# EAGLE board dosimeter (EAGLE 6.1)
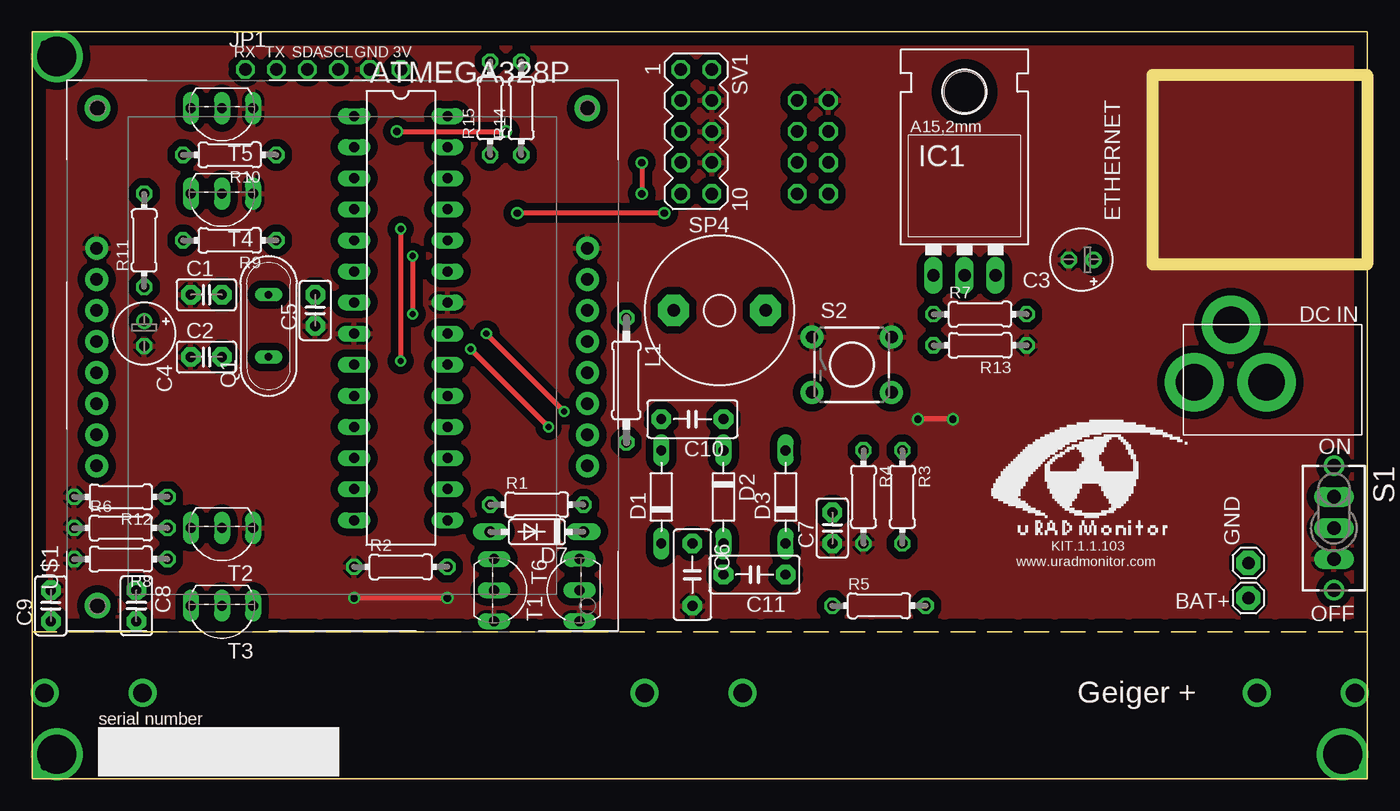
[diagram p0: board, top side]
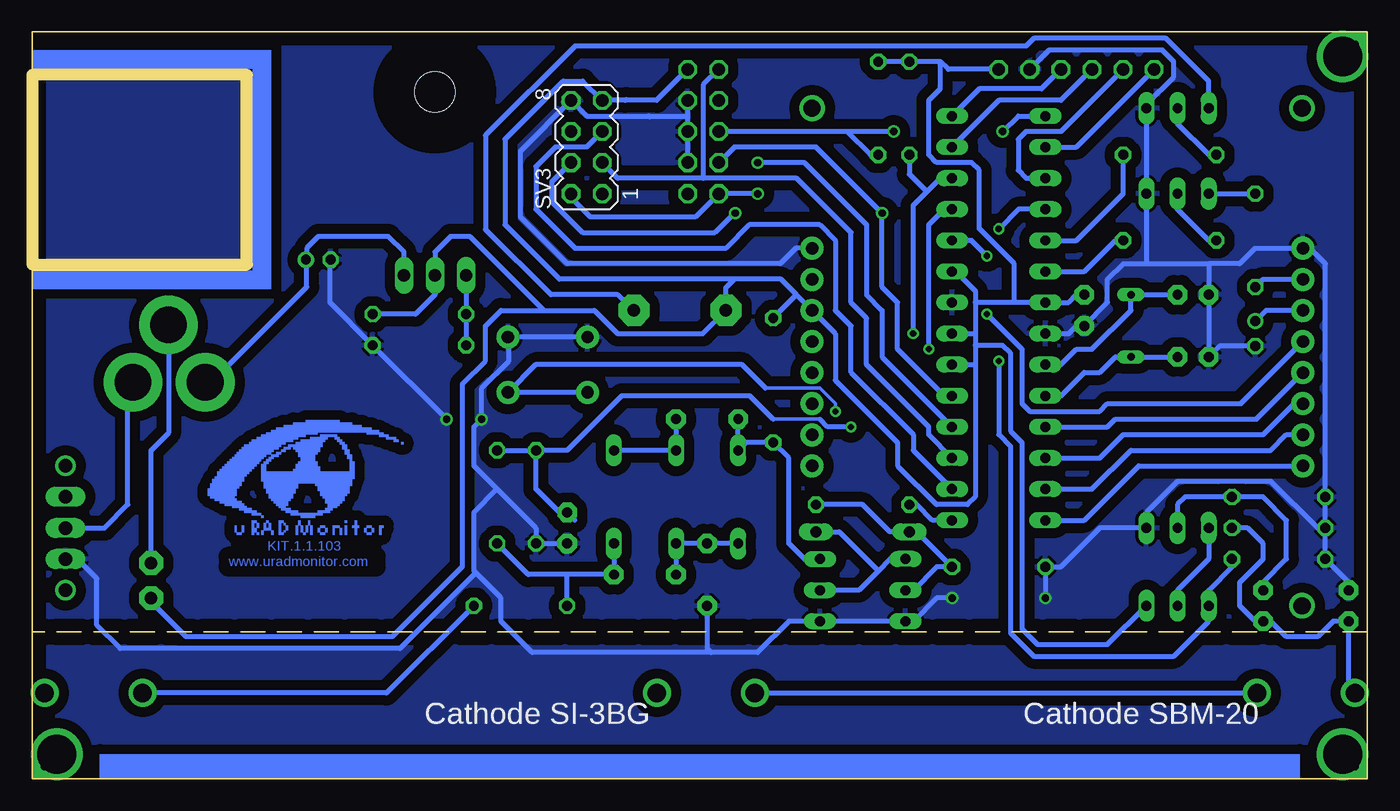
[diagram p1: board, bottom side, seen from below]

Size 109 x 61 mm. Coordinates in mm from the lower left corner, seen from the top.
Outline: 109,12 109,0 0,0 0,12
Outline: 109,12 109,61 0,61 0,12
Outline: 0,12 109,12
Copper layers (1*16): Top 0.035mm / dielectric 1.5mm / Bottom 0.035mm
Design rules: minimum track width 10mil, minimum drill 24mil, track to track 8mil, track to pad 8mil, pad to pad 8mil, via to via 8mil, smd to smd 8mil, copper to edge 40mil, drill to drill 8mil, minimum pad ring 10mil, minimum via ring 8mil, stop-mask expansion 4mil, vias tented up to drill 0mil, thermal gap 10mil
Milling: 4 lines

## Footprints (pad centres in the part's own frame; a part is rotated, then mirrored left to right if it is on the bottom)
DIL28-3 = drill 0.813 long: 1 -16.51,-3.81; 2 -13.97,-3.81; 3 -11.43,-3.81; 4 -8.89,-3.81; 5 -6.35,-3.81; 6 -3.81,-3.81; 7 -1.27,-3.81; 8 1.27,-3.81; 9 3.81,-3.81; 10 6.35,-3.81; 11 8.89,-3.81; 12 11.43,-3.81; 13 13.97,-3.81; 14 16.51,-3.81; 15 16.51,3.81; 16 13.97,3.81; 17 11.43,3.81; 18 8.89,3.81; 19 6.35,3.81; 20 3.81,3.81; 21 1.27,3.81; 22 -1.27,3.81; 23 -3.81,3.81; 24 -6.35,3.81; 25 -8.89,3.81; 26 -11.43,3.81; 27 -13.97,3.81; 28 -16.51,3.81
1X01 = drill 1.016 pad 1.93 octagon: 1 0,0
C2.5-2 = drill 0.813 pad 1.6 octagon: 1 -1.27,0; 2 1.27,0
E2-5 = drill 0.813 pad 1.27: + -1.016,0 | drill 0.813 pad 1.27 octagon: - 1.016,0
C5B3 = drill 0.813 pad 1.6 octagon: 1 -2.54,0; 2 2.54,0
GEIGER_CONNECTOR = drill 1.524 pad 2.032: GEIGER@1 0,0; GEIGER@2 8,0
D-7.5 = drill 0.813 long: A 3.81,0; C -3.81,0
DO35-7 = drill 0.9 long: A 3.81,0; C -3.81,0
PJ-102A = drill 3 pad 4.8: RING 0.1,-3.39; RING_SW -4.6,-6.29; TIP 0.1,-9.29
TO220L1 = drill 1.016 long: 1 -2.54,-3.81; 2 0,-3.81; 3 2.54,-3.81 | hole 3.302: 0,11.176
1X06-CLEAN = drill 1.016 octagon: 1 -6.35,0; 2 -3.81,0; 3 -1.27,0; 4 1.27,0; 5 3.81,0; 6 6.35,0
0207/10 = drill 0.813 octagon: 1 -5.08,0; 2 5.08,0
QS = drill 0.61 long: 1 -2.54,0; 2 2.54,0
0204/7 = drill 0.813 octagon: 1 -3.81,0; 2 3.81,0
TL3XYO = drill 1.1 pad 1.422 long: 1 -2.54,0; 2 0,0; 3 2.54,0 | drill 1.1 pad 1.676: M1 -5.08,0; M2 5.08,0
TACTILE-PTH = drill 1.016 pad 1.88: 1 -3.251,2.261; 2 3.251,2.261; 3 -3.251,-2.261; 4 3.251,-2.261
AL60P = drill 1.016 pad 2.54 octagon: 1 -3.759,0; 2 3.759,0
MA05-2 = drill 1.016 octagon: 1 -5.08,-1.27; 2 -5.08,1.27; 3 -2.54,-1.27; 4 -2.54,1.27; 5 0,-1.27; 6 0,1.27; 7 2.54,-1.27; 8 2.54,1.27; 9 5.08,-1.27; 10 5.08,1.27
MA04-2 = drill 1.016 octagon: 1 -3.81,-1.27; 2 -3.81,1.27; 3 -1.27,-1.27; 4 -1.27,1.27; 5 1.27,-1.27; 6 1.27,1.27; 7 3.81,-1.27; 8 3.81,1.27
TO92-EBC-OVAL = drill 0.813 long: B 0,-1.27; C 2.54,-1.27; E -2.54,-1.27
TO92-EBC = drill 0.813 long: B 0,-1.27; C 2.54,-1.27; E -2.54,-1.27
NOKIA5110 = drill 1.016 pad 1.88: CE@1 2.53,0; CE@2 2.53,40.08; CLK@1 10.15,0; CLK@2 10.15,40.08; DC@1 5.07,0; DC@2 5.07,40.08; DIN@1 7.61,0; DIN@2 7.61,40.08; GND@1 17.77,0; GND@2 17.77,40.08; LIGHT@1 15.23,0; LIGHT@2 15.23,40.08; RST@1 -0.01,0; RST@2 -0.01,40.08; VCC@1 12.69,0; VCC@2 12.69,40.08

## Placement (x,y rotation side)
ATMEGA328P  ATMEGA328P  [DIL28-3]  30.09,37.62 270 top
BAT+  pin 1x1  [1X01]  99.3,14.77 0 top
C1  33p  [C2.5-2]  14.21,39.53 0 top
C2  33p  [C2.5-2]  14.21,34.45 0 top
C3  22uF 25V  [E2-5]  85.65,42.39 180 top
C4  22uF 25V  [E2-5]  9.13,36.35 270 top
C5  100nF  [C2.5-2]  23.1,38.26 90 top
C6  10nF/1KV  [C5B3]  53.9,16.67 270 top
C7  15nF  [C2.5-2]  65.33,20.48 90 top
C8  33p  [C2.5-2]  8.49,14.13 270 top
C9  33pF  [C2.5-2]  1.51,14.13 90 top
C10  10nF/1KV  [C5B3]  53.9,29.37 180 top
C11  10nF/1KV  [C5B3]  58.98,16.67 180 top
CONNECTOR1  Fuse connector 6mm  [GEIGER_CONNECTOR]  1,7 0 top
CONNECTOR2  Fuse connector 6mm  [GEIGER_CONNECTOR]  50,7 0 top
CONNECTOR3  Fuse connector 6mm  [GEIGER_CONNECTOR]  100,7 0 top
D1  BYV26E  [D-7.5]  51.36,23.02 90 top
D2  BYV26E  [D-7.5]  56.44,23.02 270 top
D3  BYV26E  [D-7.5]  61.52,23.02 90 top
D7  1N4148  [DO35-7]  41.2,20.16 180 top
DC_IN_JACK  DC IN JACK  [PJ-102A]  104.17,32.48 270 top
GND  pin 1x1  [1X01]  99.3,17.62 0 top
IC1  LM1117_3.3V  [TO220L1]  76.12,44.93 0 top
JP1  pin 1x6  [1X06-CLEAN]  23.73,57.95 0 top
L1  2.2mH  [0207/10]  48.5,32.55 270 top
Q1  8Mhz  [QS]  19.29,36.99 90 top
R1  100  [0204/7]  41.2,22.38 0 top
R2  10K  [0204/7]  30.09,17.3 0 top
R3  10M  [0204/7]  71.04,23.02 270 top
R4  47K  [0204/7]  67.87,23.02 270 top
R5  10M  [0204/7]  69.14,14.13 0 top
R6  220K  [0204/7]  7.23,20.48 0 top
R7  2.2K  [0204/7]  77.39,37.94 0 top
R8  10K  [0204/7]  7.23,17.94 180 top
R9  100  [0204/7]  16.11,43.97 180 top
R10  100  [0204/7]  16.11,50.96 180 top
R11  100  [0204/7]  9.13,43.97 90 top
R12  100K  [0204/7]  7.23,23.02 180 top
R13  0 / 3K  [0204/7]  77.39,35.4 180 top
R14  10K  [0204/7]  39.93,54.77 90 top
R15  10K  [0204/7]  37.39,54.77 90 top
S1  TL32YO  [TL3XYO]  106.28,20.48 270 top
S2  Momentary switch  [TACTILE-PTH]  66.92,33.81 0 top
SP4  SELF_OSC_SPEAKER_3.3V  [AL60P]  56.12,38.26 0 top
SV1  ISP_PROGRAMMER  [MA05-2]  54.21,52.86 270 top
SV3  ethernet  [MA04-2]  63.74,51.59 90 bottom
T1  MPSA42  [TO92-EBC-OVAL]  43.42,15.4 90 top
T2  PN2222  [TO92-EBC-OVAL]  15.48,19.21 180 top
T3  PN2907  [TO92-EBC-OVAL]  15.48,12.86 180 top
T4  PN2222  [TO92-EBC]  15.48,46.52 180 top
T5  PN2222  [TO92-EBC]  15.48,53.5 180 top
T6  PN2907  [TO92-EBC-OVAL]  38.98,15.4 270 top
U$1  NOKIA_5110_LCD  [NOKIA5110]  45.33,25.56 90 top

## Library data of the parts
ATMEGA328P = atmel; OC_FARNELL: unknown; OC_NEWARK: unknown
BAT+ DC_IN_JACK GND JP1 SP4 T1-T3 T6 = adafruit
C1 C2 C5-C11 = capacitor-wima
C3 C4 = resistor
CONNECTOR1-CONNECTOR3 U$1 = pocketmagic
D1-D3 = diode
D7 = Diode2
IC1 = v-reg
L1 R1-R15 = rcl
Q1 = special
S1 = switch
S2 = sparkfun-electromechanical
SV1 SV3 = con-lstb; OC_FARNELL: unknown; OC_NEWARK: unknown
T4 T5 = transistor-neu-to92

## Nets
GND: ATMEGA328P.8 ATMEGA328P.22 C1.1 C2.1 C3.- C4.- C5.1 C6.2 C7.1 C9.2 JP1.5 R2.1 R4.2 R6.1 R8.2 R12.2 R13.1 S1.3 S2.1 S2.2 SV1.4 SV1.6 SV1.8 SV3.8 T1.E T2.E T4.E T5.E T6.C U$1.GND@1 U$1.GND@2
N$1: ATMEGA328P.9 C1.2 Q1.2
N$2: ATMEGA328P.10 C2.2 Q1.1
N$3: R11.2 T4.C
N$4: ATMEGA328P.17 SV1.1 SV3.3
N$5: ATMEGA328P.16 SV3.5
N$6: ATMEGA328P.18 SV1.9 SV3.2
N$7: R9.2 T4.B
N$8: ATMEGA328P.19 SV1.7 SV3.4
N$9: R11.1 U$1.LIGHT@1 U$1.LIGHT@2
N$10: C10.2 D1.A L1.2 T1.C
N$11: ATMEGA328P.1 R14.1 SV1.5
N$12: IC1.1 R7.1 R13.2
N$13: ATMEGA328P.24 U$1.CLK@1 U$1.CLK@2
N$14: ATMEGA328P.26 R15.1 S2.3 S2.4
N$15: DC_IN_JACK.RING S1.2
N$16: C10.1 D2.C D3.A
N$18: CONNECTOR3.GEIGER@1 CONNECTOR3.GEIGER@2 R5.2
N$20: DC_IN_JACK.RING_SW GND.1
N$21: ATMEGA328P.11 U$1.DIN@1 U$1.DIN@2
N$22: ATMEGA328P.12 U$1.DC@1 U$1.DC@2
N$23: ATMEGA328P.13 U$1.CE@1 U$1.CE@2
N$24: ATMEGA328P.14 U$1.RST@1 U$1.RST@2
N$25: ATMEGA328P.28 JP1.4
N$26: ATMEGA328P.15 R1.1
N$27: D7.A R1.2 R2.2 T6.B
N$28: C3.+ DC_IN_JACK.TIP IC1.3
N$30: C6.1 C11.2 D1.C D2.A
N$31: C11.1 D3.C R3.2 R5.1
N$32: ATMEGA328P.27 JP1.3
N$33: ATMEGA328P.3 JP1.2
N$34: ATMEGA328P.6 R9.1
N$35: ATMEGA328P.2 JP1.1
N$40: SP4.2 T5.C
N$41: R10.2 T5.B
N$42: ATMEGA328P.5 R10.1
N$52: C8.2 C9.1 CONNECTOR1.GEIGER@1 CONNECTOR1.GEIGER@2 CONNECTOR2.GEIGER@1 CONNECTOR2.GEIGER@2 R6.2
N$54: ATMEGA328P.25 C7.2 R3.1 R4.1
N$56: C8.1 R12.1 T2.B
N$59: T2.C T3.B
N$60: ATMEGA328P.4 R8.1 T3.C
N$74: D7.C T1.B T6.E
VCC_3V: ATMEGA328P.7 ATMEGA328P.20 ATMEGA328P.21 ATMEGA328P.23 BAT+.1 C4.+ C5.2 IC1.2 JP1.6 L1.1 R7.2 R14.2 R15.2 SP4.1 SV1.2 SV3.7 T3.E U$1.VCC@1 U$1.VCC@2

## Tracks (layer width: path | path; a pad name or v marks a point on that pad's centre or on a via)
GND  (via drill 0.6 pad 0.3, 0.6 pad 0.41)
  Top 0.406: v26.27,14.77 v33.89,14.77 | v75.17,29.37 v72.31,29.37
  Bottom 0.406: ATMEGA328P.8 24.37,36.35 23.73,36.99 C5.1 21.2,38.89 21.2,40.8 19.93,42.07 18.02,42.07 | 12.94,42.07 C1.1 C2.1 12.05,35.34 C4.- | 18.02,42.07 12.94,42.07 | 18.02,42.07 T4.E T5.E 18.02,55.09 15.8,57.31 15.8,58.58 16.75,59.53 25.96,59.53 JP1.5 | SV1.4 55.48,54.13 | 55.48,54.13 SV1.6 SV1.8 | 58.66,54.13 63.74,54.13 SV3.8 69.14,51.28 69.14,45.88 65.33,42.07 47.92,42.07 46.66,43.33 U$1.GND@1 | 58.66,54.13 55.48,54.13 | 12.94,42.07 10.4,42.07 9.13,43.34 5.25,43.34 U$1.GND@2 4.69,43.34 3.42,42.07 R6.1 | C9.2 1.51,16.03 R8.2 R6.1 | R6.1 R12.2 | R6.1 4.05,20.48 7.86,24.29 15.48,24.29 18.02,21.75 T2.E 21.83,20.48 25,17.3 R2.1 v26.27,14.77 | 72.95,16.99 70.72,14.77 70.72,12.86 68.19,10.32 53.58,10.32 | C7.1 R4.2 67.87,20.48 71.04,23.65 | v33.89,14.77 35.16,14.77 37.07,12.86 T6.C T1.E 47.23,12.86 49.77,10.32 53.58,10.32 | 71.04,23.65 72.95,25.56 72.95,28.73 v72.31,29.37 72.31,31.91 70.09,34.13 70.09,36 S2.2 | 58.58,54.05 58.66,54.13 | C6.2 53.9,10.64 53.58,10.32 | 72.95,16.99 72.95,21.75 71.04,23.65 | S2.1 70.05,36.08 70.09,36.04 | 72.95,16.99 72.95,16.67 78.98,10.64 101.84,10.64 103.75,12.54 103.75,16.35 105.33,17.94 S1.3 | v75.17,29.37 R13.1 84.69,38.89 84.69,42.39
  pour Top (isolate 0.61): 1,60 108,60 108,12 1,12
  pour Bottom (isolate 0.813): 1,60 108,60 108,1 1,1
N$1
  Bottom 0.406: C1.2 Q1.2 19.29,38.26 22.47,35.08 23.73,35.08 25,33.81 ATMEGA328P.9
N$2
  Bottom 0.406: C2.2 Q1.1 20.56,34.45 21.83,33.18 23.1,33.18 25,31.27 ATMEGA328P.10
N$3
  Bottom 0.406: T4.C R11.2
N$4
  Bottom 0.406: ATMEGA328P.17 35.8,28.1 35.8,28.73 40.88,33.81 40.88,37.62 42.15,38.89 42.15,44.61 46.59,49.05 54.21,49.05 | SV1.1 54.21,56.67 54.21,49.05 | 54.21,49.05 61.2,49.05 SV3.3
N$5
  Bottom 0.406: SV3.5 63.74,51.59 66.28,51.59 67.87,50.01 67.87,46.52 64.69,43.34 52.37,43.34 50.46,45.24 44.69,45.24 43.42,43.97 43.42,38.26 42.15,36.99 42.15,33.18 37.07,28.1 37.07,26.83 ATMEGA328P.16 34.53,23.65
N$6  (via drill 0.6 pad 0.3, 0.6 pad 0.41)
  Top 0.406: v49.77,50.32 v49.77,47.78 49.83,47.84
  Bottom 0.406: SV3.2 65.01,47.47 63.42,45.88 54.85,45.88 SV1.9 v49.77,47.78 | 34.53,28.73 ATMEGA328P.18 39.61,34.45 39.61,38.26 40.88,39.53 40.88,45.24 45.96,50.32 v49.77,50.32
N$7
  Bottom 0.406: R9.2 12.94,43.97 15.48,46.52 T4.B
N$8  (via drill 0.6 pad 0.3)
  Top 0.406: v51.59,46.2 v39.61,46.2
  Bottom 0.406: SV3.4 66.6,48.74 66.6,47.15 64.06,44.61 53.26,44.61 51.67,46.2 v51.59,46.2 | ATMEGA328P.19 34.53,31.27 38.34,35.08 38.34,38.89 39.61,40.16 v39.61,46.2 45.01,51.59 51.67,51.59 SV1.7
N$9
  Bottom 0.406: R11.1 8.49,40.8 5.25,40.8 U$1.LIGHT@2
N$10
  Bottom 0.406: T1.C 45.96,17.94 47.23,19.21 47.23,26.2 L1.2 50.72,27.46 D1.A C10.2
N$11  (via drill 0.6 pad 0.41)
  Top 0.406: v29.77,52.86 v38.66,52.86
  Bottom 0.406: 42.47,52.86 SV1.5 | v38.66,52.86 42.47,52.86 | R14.1 40.56,50.96 42.47,52.86 | v29.77,52.86 28.5,54.13 ATMEGA328P.1
N$12
  Bottom 0.406: IC1.1 R7.1 R13.2
N$13  (via drill 0.5 pad 0.25)
  Top 0.406: v31.04,42.7 v31.04,37.94
  Bottom 0.406: 5.25,35.72 U$1.CLK@2 10.32,30.64 21.2,30.64 21.83,30 27.54,30 28.18,30.64 28.18,35.08 v31.04,37.94 | ATMEGA328P.24 32.31,43.97 v31.04,42.7
N$14  (via drill 0.5 pad 0.25)
  Top 0.406: v37.07,36.35 v43.42,30
  Bottom 0.305: v43.42,30 43.42,30.64 44.69,31.91 49.13,31.91
  Bottom 0.406: 49.13,31.91 51.04,33.81 67.91,33.81 S2.4 S2.3 | v37.07,36.35 37.07,46.83 35.96,47.94 | 35.96,47.94 34.85,49.05 ATMEGA328P.26 | R15.1 37.39,49.37 35.96,47.94
N$15
  Bottom 0.406: S1.2 103.11,20.48 101.2,22.38 101.2,31.96 DC_IN_JACK.RING
N$16
  Bottom 0.406: C10.1 D2.C D3.A
N$17  (via drill 1.4)
  other vias: 5.32,54.77
N$18
  Bottom 0.406: R5.2 80.08,7 CONNECTOR3.GEIGER@1
N$19  (via drill 1.4)
  other vias: 5.32,14.13
N$20
  Bottom 0.406: GND.1 99.3,26.83 97.89,28.24 DC_IN_JACK.RING_SW
N$21
  Bottom 0.406: ATMEGA328P.11 21.2,28.73 20.56,29.37 9.05,29.37 U$1.DIN@2
N$22
  Bottom 0.406: ATMEGA328P.12 21.83,26.2 19.93,28.1 8.49,28.1 5.95,30.64 5.25,30.64 U$1.DC@2
N$23
  Bottom 0.406: ATMEGA328P.13 22.47,23.65 19.29,26.83 7.86,26.83 6.59,28.1 5.25,28.1 U$1.CE@2
N$24
  Bottom 0.406: ATMEGA328P.14 23.1,21.11 18.66,25.56 5.25,25.56 U$1.RST@2
N$25
  Bottom 0.406: JP1.4 26.59,56.36 31.67,56.36 ATMEGA328P.28
N$26
  Bottom 0.406: ATMEGA328P.15 35.48,21.11 36.75,22.38 R1.1
N$27
  Bottom 0.406: T6.B 37.07,15.4 35.16,17.3 R2.2 36.75,20.16 D7.A 38.98,20.16 41.2,22.38 R1.2
N$28
  Bottom 0.406: IC1.3 78.66,43.02 79.93,44.29 85.65,44.29 86.6,43.34 86.6,42.45 C3.+ 86.6,42.32 86.6,40.16 94.39,32.38 DC_IN_JACK.TIP
N$29  (via drill 0.6 pad 2)
  other vias: 108,1
N$30
  Bottom 0.406: D1.C C6.1 D2.A C11.2
N$31
  Bottom 0.406: D3.C C11.1 65.33,16.67 | 65.33,16.67 68.5,16.67 R3.2 | R5.1 65.33,16.67
N$32
  Bottom 0.406: ATMEGA328P.27 30.09,55.41 25,55.41 JP1.3
N$33
  Bottom 0.406: JP1.2 25,52.86 27.86,52.86 28.5,52.23 28.5,49.69 27.86,49.05 ATMEGA328P.3
N$34
  Bottom 0.406: ATMEGA328P.6 23.1,41.44 20.56,43.97 R9.1
N$35
  Bottom 0.406: ATMEGA328P.2 23.73,51.59 JP1.1
N$40
  Bottom 0.406: T5.C 12.94,56.99 16.43,60.48 27.23,60.48 27.86,59.85 64.69,59.85 72,52.55 72,44.87 66.65,39.53 61.2,39.53 59.93,38.26 SP4.2
N$41
  Bottom 0.406: R10.2 12.94,50.96 15.48,53.5 T5.B
N$42
  Bottom 0.406: ATMEGA328P.5 23.73,43.97 19.93,47.78 R10.1
N$45  (via drill 1.4)
  other vias: 45.33,54.77
N$46  (via drill 0.6 pad 2)
  other vias: 1,1
N$47  (via drill 0.6 pad 2)
  other vias: 1,60
N$52
  Bottom 0.406: R6.2 9.76,20.48 8.49,19.21 8.49,17.94 10.4,16.03 10.4,14.13 9.13,12.86 C8.2 7.86,12.86 6.59,11.59 4.05,11.59 2.78,12.86 C9.1 1.51,7.46 1.05,7 CONNECTOR1.GEIGER@1 | CONNECTOR2.GEIGER@1 CONNECTOR1.GEIGER@2
N$54  (via drill 0.5 pad 0.25)
  Top 0.406: v35.8,35.08 v42.15,28.73
  Bottom 0.305: 44.69,29.37 48.5,29.37
  Bottom 0.406: R3.1 R4.1 | R4.1 67.87,23.65 65.96,21.75 C7.2 64.69,21.11 | ATMEGA328P.25 34.53,46.52 35.8,45.24 v35.8,35.08 | 48.5,29.37 50.41,31.27 60.88,31.27 65.33,26.83 R4.1 | v42.15,28.73 44.06,28.73 44.69,29.37
N$56
  Bottom 0.406: C8.1 8.49,16.03 6.59,17.94 6.59,21.11 8.49,23.02 R12.1 14.84,23.02 15.48,22.38 T2.B
N$59
  Bottom 0.406: T2.C 12.94,17.94 15.48,15.4 T3.B
N$60  (via drill 0.5 pad 0.25)
  Top 0.406: v30.09,44.91 30.1,44.59 30.09,44.61 v30.09,34.13
  Bottom 0.406: R8.1 11.04,17.3 12.94,15.4 T3.C 12.94,12.86 15.8,10 27.23,10 29.13,11.91 29.13,27.15 30.09,28.1 v30.09,34.13 | 30.07,44.61 v30.09,44.91 28.48,46.52 ATMEGA328P.4
N$74
  Bottom 0.406: T6.E 38.98,17.94 39.93,16.99 | 39.93,16.99 41.52,15.4 T1.B | D7.C 43.1,20.16 39.93,16.99
N$80  (via drill 3.2 pad 3.81)
  other vias: 2,59
N$81  (via drill 3.2 pad 3.81)
  other vias: 2,2
N$82  (via drill 3.2 pad 3.81)
  other vias: 107,2
VCC_3V
  Bottom 0.406: C5.2 23.73,39.53 24.37,38.89 ATMEGA328P.7 28.81,38.89 | 28.81,38.89 31.99,38.89 | 60.56,55.41 58.02,55.41 SV1.2 | 60.56,55.41 SV3.7 64.06,56.99 65.64,56.99 70.41,52.23 70.41,45.24 65.96,40.8 51.67,40.8 | 31.99,38.89 31.99,36.35 | 31.99,36.35 31.99,35.4 | 31.99,35.4 31.99,33.81 | 31.99,33.81 31.99,23.02 32.63,22.38 35.16,22.38 38.34,25.56 38.34,27.46 43.42,32.55 43.42,36.35 U$1.VCC@1 | U$1.VCC@1 | U$1.VCC@1 | U$1.VCC@1 46.59,39.53 | 46.59,39.53 47.87,40.8 51.67,40.8 | U$1.VCC@2 8.25,38.25 C4.+ | T3.E 21.2,10.95 26.91,10.95 28.18,12.22 28.18,27.46 29.13,28.42 29.13,34.77 29.77,35.4 31.99,35.4 | 51.67,40.8 52.36,40.11 SP4.1 54.27,36.35 61.2,36.35 63.1,38.26 67.23,38.26 | L1.1 46.59,39.53 | 60.48,55.48 60.56,55.41 | BAT+.1 99.3,14.45 96.44,11.59 79.61,11.59 73.9,17.3 73.9,32.23 72,34.13 72,36.99 70.72,38.26 67.23,38.26 | 67.23,38.26 73.27,44.29 74.85,44.29 76.12,43.02 IC1.2 76.12,39.53 77.71,37.94 R7.2 | 34.85,58.58 34.85,56.36 35.8,55.41 35.8,50.96 35.16,50.32 32.31,50.32 31.67,49.69 31.67,44.93 28.81,42.07 28.81,38.89 | 34.85,58.58 R15.2 R14.2 | ATMEGA328P.23 33.58,41.44 31.99,39.85 31.99,38.89 | 33.58,33.81 ATMEGA328P.20 31.99,33.81 | ATMEGA328P.21 31.99,36.35 | JP1.6 34.21,57.95 34.85,58.58
(copper drawn outside any net)
  shapes: Bottom area x208

## Text on the board
Bottom: KIT.1.1.103 | www.uradmonitor.com
tPlace: RX | TX | SDA | SCL | GND | 3V | ETHERNET | DC IN | ON | KIT.1.1.103 | www.uradmonitor.com | OFF | Geiger + | serial number
bPlace: Cathode SBM-20 | Cathode SI-3BG